# Altium PCB STM8S003F3P6_RF433_315_LEARN_CODE_V1_0.PcbDoc
Units mil, origin at the board's own origin, x right, y up, seen from the top; angles counter-clockwise.
Board outline 2495.35 x 1511.09 mil, 2 copper layers (Top Layer, Bottom Layer); 20 components, 21 nets, 81 pads, 3 vias.
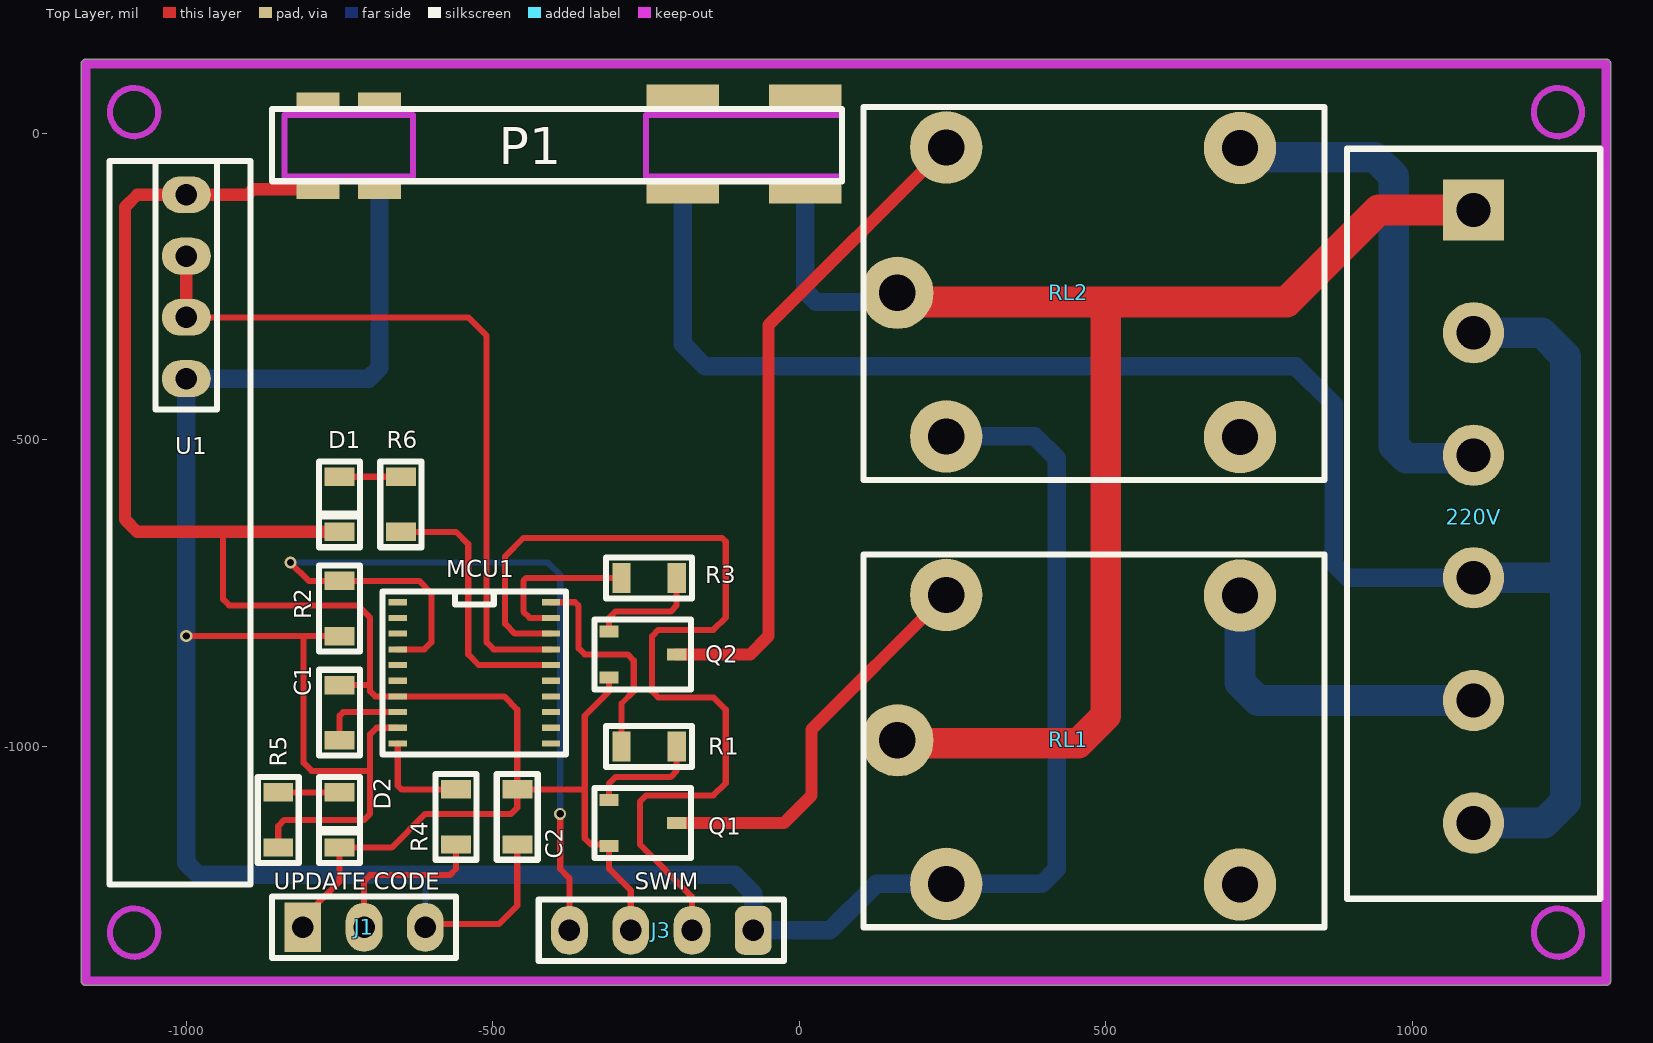
[diagram p0: Top Layer view]
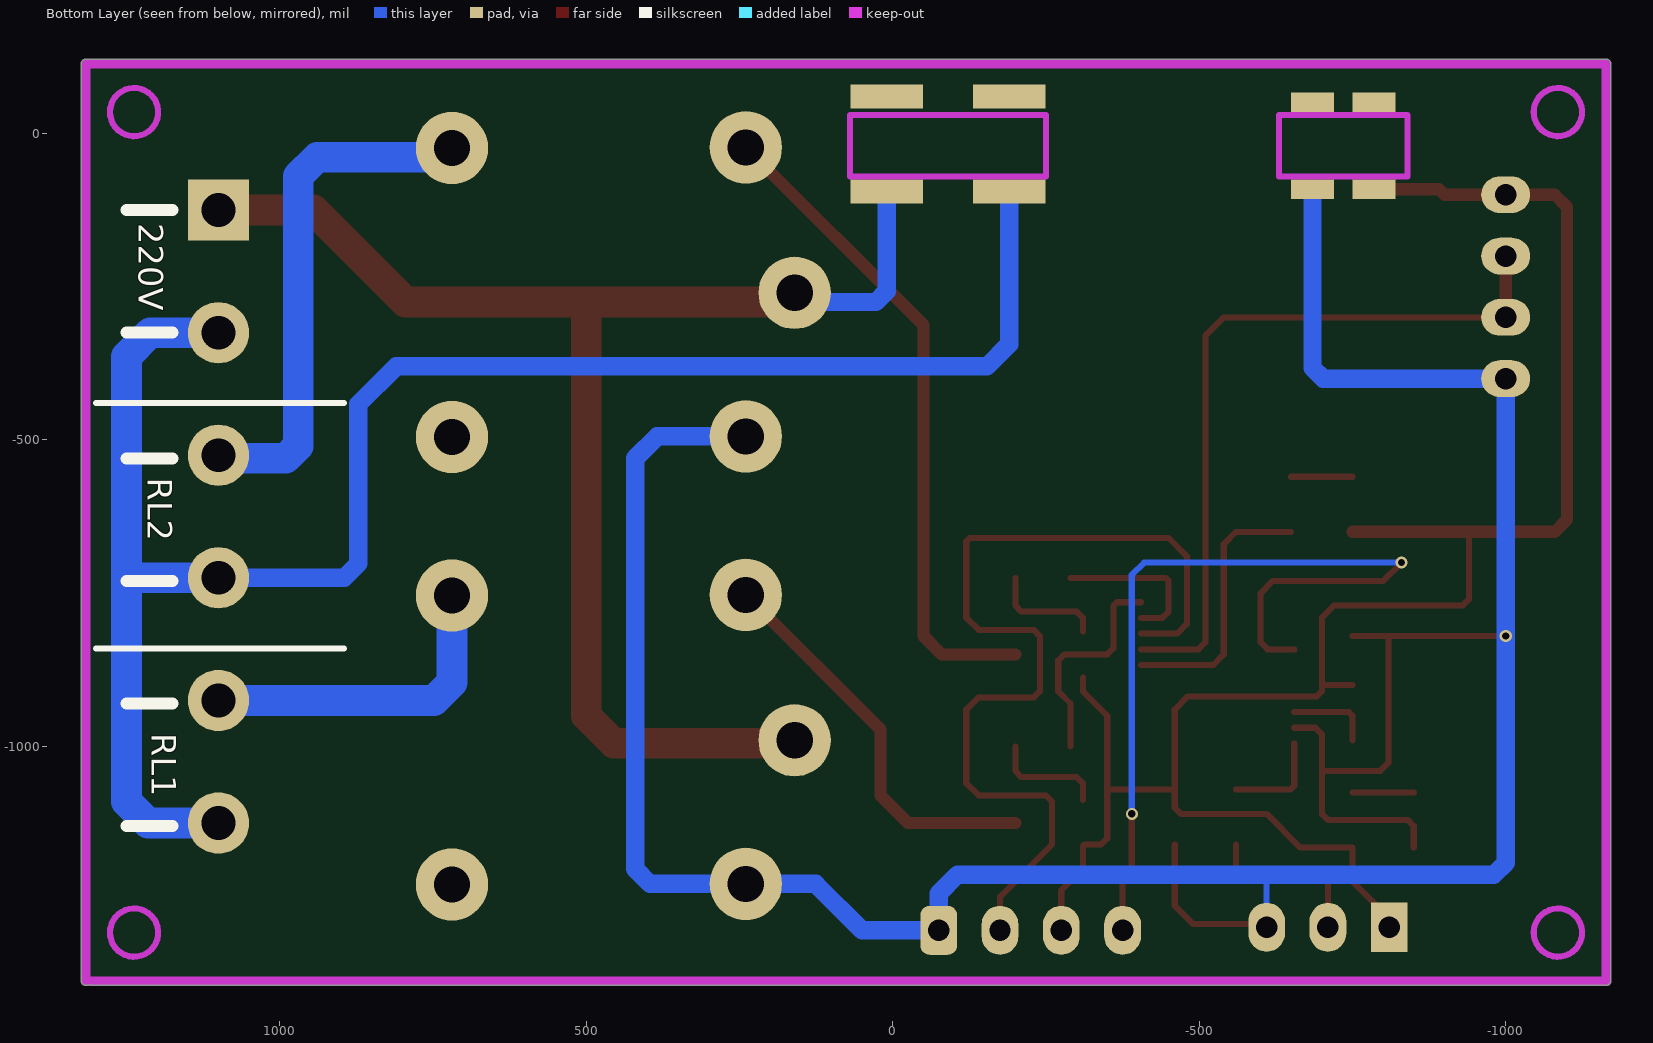
[diagram p1: Bottom Layer view, seen from below]

## Layer stack, top to bottom
Top Solder: solder mask 0.4, Solder Resist, Dk 3.5
Top Layer: signal copper 1.4
Dielectric 1: dielectric 12.6, FR-4, Dk 4.8
Bottom Layer: signal copper 1.4
Bottom Solder: solder mask 0.4, Solder Resist, Dk 3.5

## Board outline
-1171.42,-1382.49 ccw(c-1163.91,-1382.49) -1163.91,-1390 1308.22,-1390 ccw(c1308.22,-1382.49) 1312.24,-1388.84 ccw(c1316.25,-1382.49) 1321.64,-1387.72 ccw(c1316.41,-1382.33) 1323.92,-1382.33 1323.92,113.57 ccw(c1316.41,113.57) 1315.43,121.03 ccw(c1314.44,113.57) 1314.44,121.09 -1163.91,121.09 ccw(c-1163.91,113.57) -1171.42,113.57

## Design rules (kind name [scope] priority, off if disabled: settings)
Clearance [All] p1: gap=10 ignorepadtopadclearanceinfootprint=FALSE except(0: Arc-Hole Track-Hole SMDPad-Hole THPad-Hole Via-Hole Fill-Hole Poly-Hole Region-Hole Text-Hole)
PolygonConnect [All] p1: connectstyle=Relief reliefconductorwidth=10 reliefentries=4 polygonreliefangle="90 Angle" airgapwidth=10
RoutingVias [All] p1: holewidth=28 width=50 viastyle="Through Hole" minholewidth=28 minwidth=50 maxholewidth=28 maxwidth=50
SolderMaskExpansion [All] p1: expansion=4 istentingtop=FALSE
Width [All] p1: maxlimit=50 minlimit=10 preferedwidth=30
30 further rules are at their usual default settings.

## Components (designator, comment, footprint, x,y, rotation, side; value= is the part's Value field where it differs from the comment)
220V "KF128" HEADER_KF128_6_5.08MM 1100,-625 r270 top
C1 "104" C0805 -750,-945 r270 top
C2 "103" C0805 -460,-1115 r90 top
D1 "LED0805" L0805RED -750,-605 r270 top
D2 "LED0805" L0805RED -750,-1120 r270 top
J1 "UPDATE CODE" "Header 3x1 TH Pitch 2.54mm" -710,-1295 r0 top
J3 "SWIM" "Header 4x1 TH Pitch 2.54mm" -230,-1295 r270 top
MCU1 "STM8S003F3P6" TSSOP20_0.65_4.4 -530,-880 r0 top
P1 "MODULE_5V_700mA" MODULE_5V_700mA -190,-20 r0 top
Q1 "2SC1815" SOT23-3 -255.12,-1125 r270 top
Q2 "2SC1815" SOT23-3 -255.12,-850 r270 top
R1 "4K7" R0805 -245,-1000 r0 top
R2 "4K7" R0805 -750,-775 r270 top
R3 "4K7" R0805 -245,-725 r0 top
R4 "10K" R0805 -560,-1115 r270 top
R5 "1K" R0805 -850,-1120 r270 top
R6 "1K" R0805 -650,-605 r90 top
RL1 "RELAY_10A" RELAY_10A_5PIN 484.8,-985.08 r0 top
RL2 "RELAY_10A" RELAY_10A_5PIN 484.8,-255.08 r0 top
U1 "RF433_315_RECEVICE" RF433_315_RECEVICE -1000,-600 r90 top

## Footprints (in the part's own frame and the unit in brackets; to place one, negate y for a bottom-side part, rotate by r counter-clockwise, add the part's x,y. Pads: shape width x height; smd on the part's side, far side on the other; paste and mask are expansions set on the pad)
C0805 [mil]
  rect 30x48.82 smd: 1(-45,0) 2(45,0)
  silkscreen extent -70,-33 70,33, body extent -39,-24 39,24, height 39
"Header 3x1 TH Pitch 2.54mm" [mil]
  rect 60x80 hole 35: 1(-100,0)
  oval 60x80 hole 35: 2(0,0) 3(100,0)
  silkscreen extent -150,-50 150,50, body extent -150,-50 150,50, height 350
"Header 4x1 TH Pitch 2.54mm" [mil]
  rrect50% 80x60 hole 35: 1(5,155)
  oval 80x60 hole 35: 2(5,55) 3(5,-45) 4(5,-145)
  silkscreen extent -45,-195 55,205, body extent -45,-195 55,205, height 350
HEADER_KF128_6_5.08MM [mil]
  rect 100x100 hole 55: 1(-500,0)
  round 100 hole 55: 2(-300,0) 3(-100,0) 4(100,0) 5(300,0) 6(500,0)
  silkscreen extent -600,-207 624,207, body extent -600,-207 624,207, height 563
L0805RED [mil]
  rect 30x48.82 smd: 1(-45,0) 2(45,0)
  silkscreen extent -70,-35 70,35, body extent -39,-25 39,25, height 43
MODULE_5V_700mA [mm]
  rect 1.779x0.8 all layers, no hole: 0(-15.108,1.8) 0(-12.568,1.8) 3(-12.568,-1.8) 4(-15.108,-1.8)
  rect 3x1 all layers, no hole: 0(0,2.032) 0(5.08,2.032) 1(5.08,-1.905) 2(0,-1.905)
  silkscreen extent -17.02,-1.48 6.6,1.52
R0805 [mil]
  rect 30x48.82 smd: 1(-45,0) 2(45,0)
  silkscreen extent -70,-33 70,33, body extent -39,-25 40,25, height 18
RELAY_10A_5PIN [mm]
  round 3 hole 1.5: 1(-6.225,5.9) 2(-8.25,-0.125) 3(-6.225,-6.075) 4(5.95,-6.1) 5(5.95,5.875)
  silkscreen extent -9.65,-7.88 9.45,7.57, body extent -9.65,-7.88 9.45,7.62, height 15.3
RF433_315_RECEVICE [mil]
  oval 60x80 hole 35: 1(200,0) 2(300,0) 3(400,0) 4(500,0)
  silkscreen extent -625,-105 555,125, body extent -626,-105 555,167, height 472
SOT23-3 [mm]
  rect 0.5x0.8 smd: 1(-0.95,-1.4) 2(0.95,-1.4) 3(0,1.4)
  silkscreen extent -1.45,-2 1.45,2, body extent -1.45,-1.4 1.45,1.4, height 1.3
TSSOP20_0.65_4.4 [mil]
  rect 30x10 smd: 1(-125,115.16) 2(-125,89.57) 3(-125,63.98) 4(-125,38.39) 5(-125,12.8) 6(-125,-12.8) 7(-125,-38.39) 8(-125,-63.98) 9(-125,-89.57) 10(-125,-115.16) 11(125,-115.16) 12(125,-89.57) 13(125,-63.98) 14(125,-38.39) 15(125,-12.8) 16(125,12.8) 17(125,38.39) 18(125,63.98) 19(125,89.57) 20(125,115.16)
  silkscreen extent -150,-133 150,133, body extent -124,-128 124,128, height 43

## Part data
220V: library part HEADER_KF128_6_5.08MM
C1 C2: library part C0805
J1: library part "Header 3x1 TH Pitch 2.54mm"
J3: library part "Header 4x1 TH Pitch 2.54mm"
Q1 Q2: library part "2SC1815 (SOT-23)"
R1 R2 R3 R4 R5 R6: library part "Resistor SMD"
U1: library part RF433_315

## Via types
v1: diameter 19.68, hole 11.81, Top Layer to Bottom Layer, 3 vias

## Nets (pads, with @x,y where several pads share a name; then routed paths per layer and width w, separated by ;. In a path a pad name is that pad's centre, name@x,y a point inside that pad or via, vN(x,y) a via of type N, cw(c..) or ccw(c..) an arc to the next point about the centre after c; other vN are vias at no path point)
GND: C1.1 C2.2 D1.2 D2.2 J1.1 J3.3 MCU1.7 P1.4 Q1.2 Q2.2 U1.4 | length 3193.4
  Top Layer w10: -940,-650 -940,-760 -930,-770 -720,-770 -700,-790 -700,-900 ; J1.1@-810,-1290 -810,-1280 -750,-1220 D2.2 -665,-1165 -610,-1110 -470,-1110 -460,-1100 C2.2 ; C1.1 -700,-900 ; Q2.2 -310.24,-910.24 -350,-950 -350,-1070 ; J3.3 -275,-1235 -310.24,-1199.76 Q1.2 -312.64,-1160 -340,-1160 -350,-1150 -350,-1070 ; -700,-900 -700,-910 -691.61,-918.39 MCU1.7 -481.61,-918.39 -460,-940 C2.2 ; C2.2 -350,-1070
  Top Layer w20: P1.4 -890.87,-90.87 -900,-100 U1.4 -1080,-100 -1100,-120 -1100,-630 -1080,-650 -940,-650 D1.2
Net220V_1: 220V.1 P1.1 RL1.2 RL2.2 | length 2340.4
  Top Layer w50: RL1.2@149.25,-975.16 RL1.2@155.2,-975.16 ; RL2.2@175,-275 500,-275 ; RL1.2@180.94,-994.76 455.24,-994.76 500,-950 500,-275 ; 220V.1 945,-125 795,-275 500,-275
  Bottom Layer w30: P1.1 10,-257.43 27.57,-275 RL2.2@175,-275
Net220V_2: 220V.2 220V.4 220V.6 P1.2 | length 3069.3
  Bottom Layer w30: P1.2 -190,-343.78 -153.78,-380 810,-380 871.68,-441.68 871.68,-701.68 895,-725 220V.4
  Bottom Layer w50: 220V.6 1215,-1125 1250,-1090 1250,-725 ; 220V.4 1250,-725 ; 220V.2@1109.57,-334.57 220V.2 1211.14,-325 1250,-363.86 1250,-725
Net220V_3: 220V.3 RL2.5 | length 829.2
  Bottom Layer w50: RL2.5@734.06,-38.78 938.78,-38.78 970,-70 970,-510 990,-530 1095,-530 220V.3
Net220V_5: 220V.5 RL1.5 | length 554.8
  Bottom Layer w50: RL1.5@718.31,-758.7 RL1.5@718.31,-738.94 ; RL1.5 719.06,-895.71 748.34,-925 220V.5
NetC1_2: C1.2 MCU1.8 | length 137.5
  Top Layer w10: C1.2 -750,-950 -743.98,-943.98 MCU1.8
NetD1_1: D1.1 R6.2 | length 100
  Top Layer w10: D1.1 R6.2
NetD2_1: D2.1 R5.1 | length 100
  Top Layer w10: R5.1 D2.1
NetJ1_2: J1.2 R4.2 | length 283.3
  Top Layer w10: J1.2@-710,-1305 -710,-1290 -710,-1220 -700,-1210 -570,-1210 -560,-1200 R4.2
NetMCU1_19: MCU1.19 R3.1 | length 261.4
  Top Layer w10: MCU1.19 -439.57,-790.43 -450,-780 -450,-730 -445,-725 R3.1
NetMCU1_20: MCU1.20 R1.1 | length 363.3
  Top Layer w10: MCU1.20 -365.86,-764.84 -360,-770.7 -360,-840 -350,-850 -280,-850 -270,-860 -270,-910 -290,-930 R1.1
NetQ1_1: Q1.1 R1.2 | length 186
  Top Layer w10: Q1.1 -310.24,-1060.24 -300,-1050 -210,-1050 -200,-1040 R1.2
NetQ1_3: Q1.3 RL1.1 | length 686
  Top Layer w20: Q1.3 -25,-1125 20,-1080 20,-972.52 RL1.1@232.52,-760 ; RL1.1 RL1.1@232.52,-760 ; RL1.1@260.67,-757.56 258.23,-760 RL1.1@232.52,-760
NetQ2_1: Q2.1 R3.2 | length 186
  Top Layer w10: Q2.1 -310.24,-790.24 -300,-780 -210,-780 -200,-770 R3.2
NetQ2_3: Q2.3 RL2.1 | length 1079.6
  Top Layer w20: Q2.3 -80,-850 -50,-820 -50,-312.52 RL2.1
NRST: J3.4 MCU1.4 R2.1 | length 1425
  Top Layer w10: v1(-830,-700) -800,-730 R2.1 -620,-730 -600,-750 -600,-830 -611.61,-841.61 MCU1.4 ; v1(-390,-1110) -390,-1200 -375,-1215 J3.4
  Bottom Layer w10: v1(-830,-700) -410,-700 -390,-720 v1(-390,-1110)
RF_OUT: MCU1.17 U1.2 U1.3 | length 1212.2
  Top Layer w10: U1.2 -540,-300 -510,-330 -510,-830 -498.39,-841.61 MCU1.17
  Top Layer w20: U1.2 U1.3
STATUS: MCU1.16 R6.1 | length 440.4
  Top Layer w10: R6.1 -560,-650 -540,-670 -540,-850 -522.8,-867.2 MCU1.16
SWIM: J3.2 MCU1.18 | length 1563.1
  Top Layer w10: MCU1.18 -463.98,-816.02 -480,-800 -480,-690 -450,-660 -125.86,-660 -120,-665.86 -120,-790 -140,-810 -230,-810 -240,-820 -240,-910 -230,-920 -140,-920 -120,-940 -120,-1060 -140,-1080 -250,-1080 -260,-1090 -260,-1160 -175,-1245 J3.2
UPDATE: MCU1.10 R4.1 | length 166.4
  Top Layer w10: MCU1.10 -655,-1064.14 -649.14,-1070 R4.1
VCC: C2.1 J1.3 J3.1 MCU1.9 P1.3 R2.2 R5.2 RL1.3 RL2.3 U1.1 | length 5109.5
  Top Layer w10: v1(-1000,-820) -810,-820 ; R5.2 -850,-1130 -840,-1120 -710,-1120 -700,-1110 -700,-1040 ; R2.2 -810,-820 ; MCU1.9 -689.57,-969.57 -700,-980 -700,-1040 ; J1.3 -610,-1290 -490,-1290 -460,-1260 C2.1 ; RL1.3@244.17,-1229.92 RL1.3@244.92,-1229.17 ; -810,-820 -808.58,-821.42 -808.58,-1026.75 -795.33,-1040 -700,-1040
  Bottom Layer w10: J1.3 -610,-1209.25
  Bottom Layer w30: P1.3 -684.78,-382.43 -702.36,-400 U1.1 v1(-1000,-820) -1000,-1190 -980.75,-1209.25 -610,-1209.25 -105.75,-1209.25 -75,-1240 J3.1 50,-1300 125.75,-1224.25 RL1.3 395.75,-1224.25 420,-1200 420,-530 384.25,-494.25 RL2.3
pads on no net: MCU1.1 MCU1.2 MCU1.3 MCU1.5 MCU1.6 MCU1.11 MCU1.12 MCU1.13 MCU1.14 MCU1.15 P1.0 RL1.4 RL2.4

## Keep-outs
Keep-Out Layer:
  circle w10: c-1085.17,34.83 r39.37
  circle w10: c1237.67,-1303.75 r39.37
  circle w10: c-1085.17,-1303.75 r39.37
  circle w10: c1237.67,34.83 r39.37
  lines w10: -840,-70 -630,-70 -630,30 -840,30 -840,-70 ; -250,-70 70,-70 70,30 -250,30 -250,-70
  lines w15: 1308.22,-1382.49 -1163.91,-1382.49 -1163.91,113.57 1314.44,113.57 ; 1316.25,-1382.49 1316.25,-1374.46 1316.41,-1374.46 ; 1316.41,-1382.33 1316.41,113.57

## Silkscreen, mask and mechanical layers (free items; w line width, h text height)
Bottom Overlay:
  lines w10: 895,-840 1300,-840 ; 895,-440 1300,-440
  lines w19.68: 1175,-1130 1250,-1130 ; 1175,-930 1250,-930 ; 1175,-730 1250,-730 ; 1175,-530 1250,-530 ; 1175,-325 1250,-325 ; 1175,-125 1250,-125